# Altium PCB tc_tp6_ej3.PcbDoc
Units mm, origin at the board's own origin, x right, y up, seen from the top; angles counter-clockwise.
Board outline 100 x 100 mm, 2 copper layers (Top Layer, Bottom Layer); 34 components, 26 nets, 92 pads, 0 vias.
Unrouted connection lines stored in the file: 2.
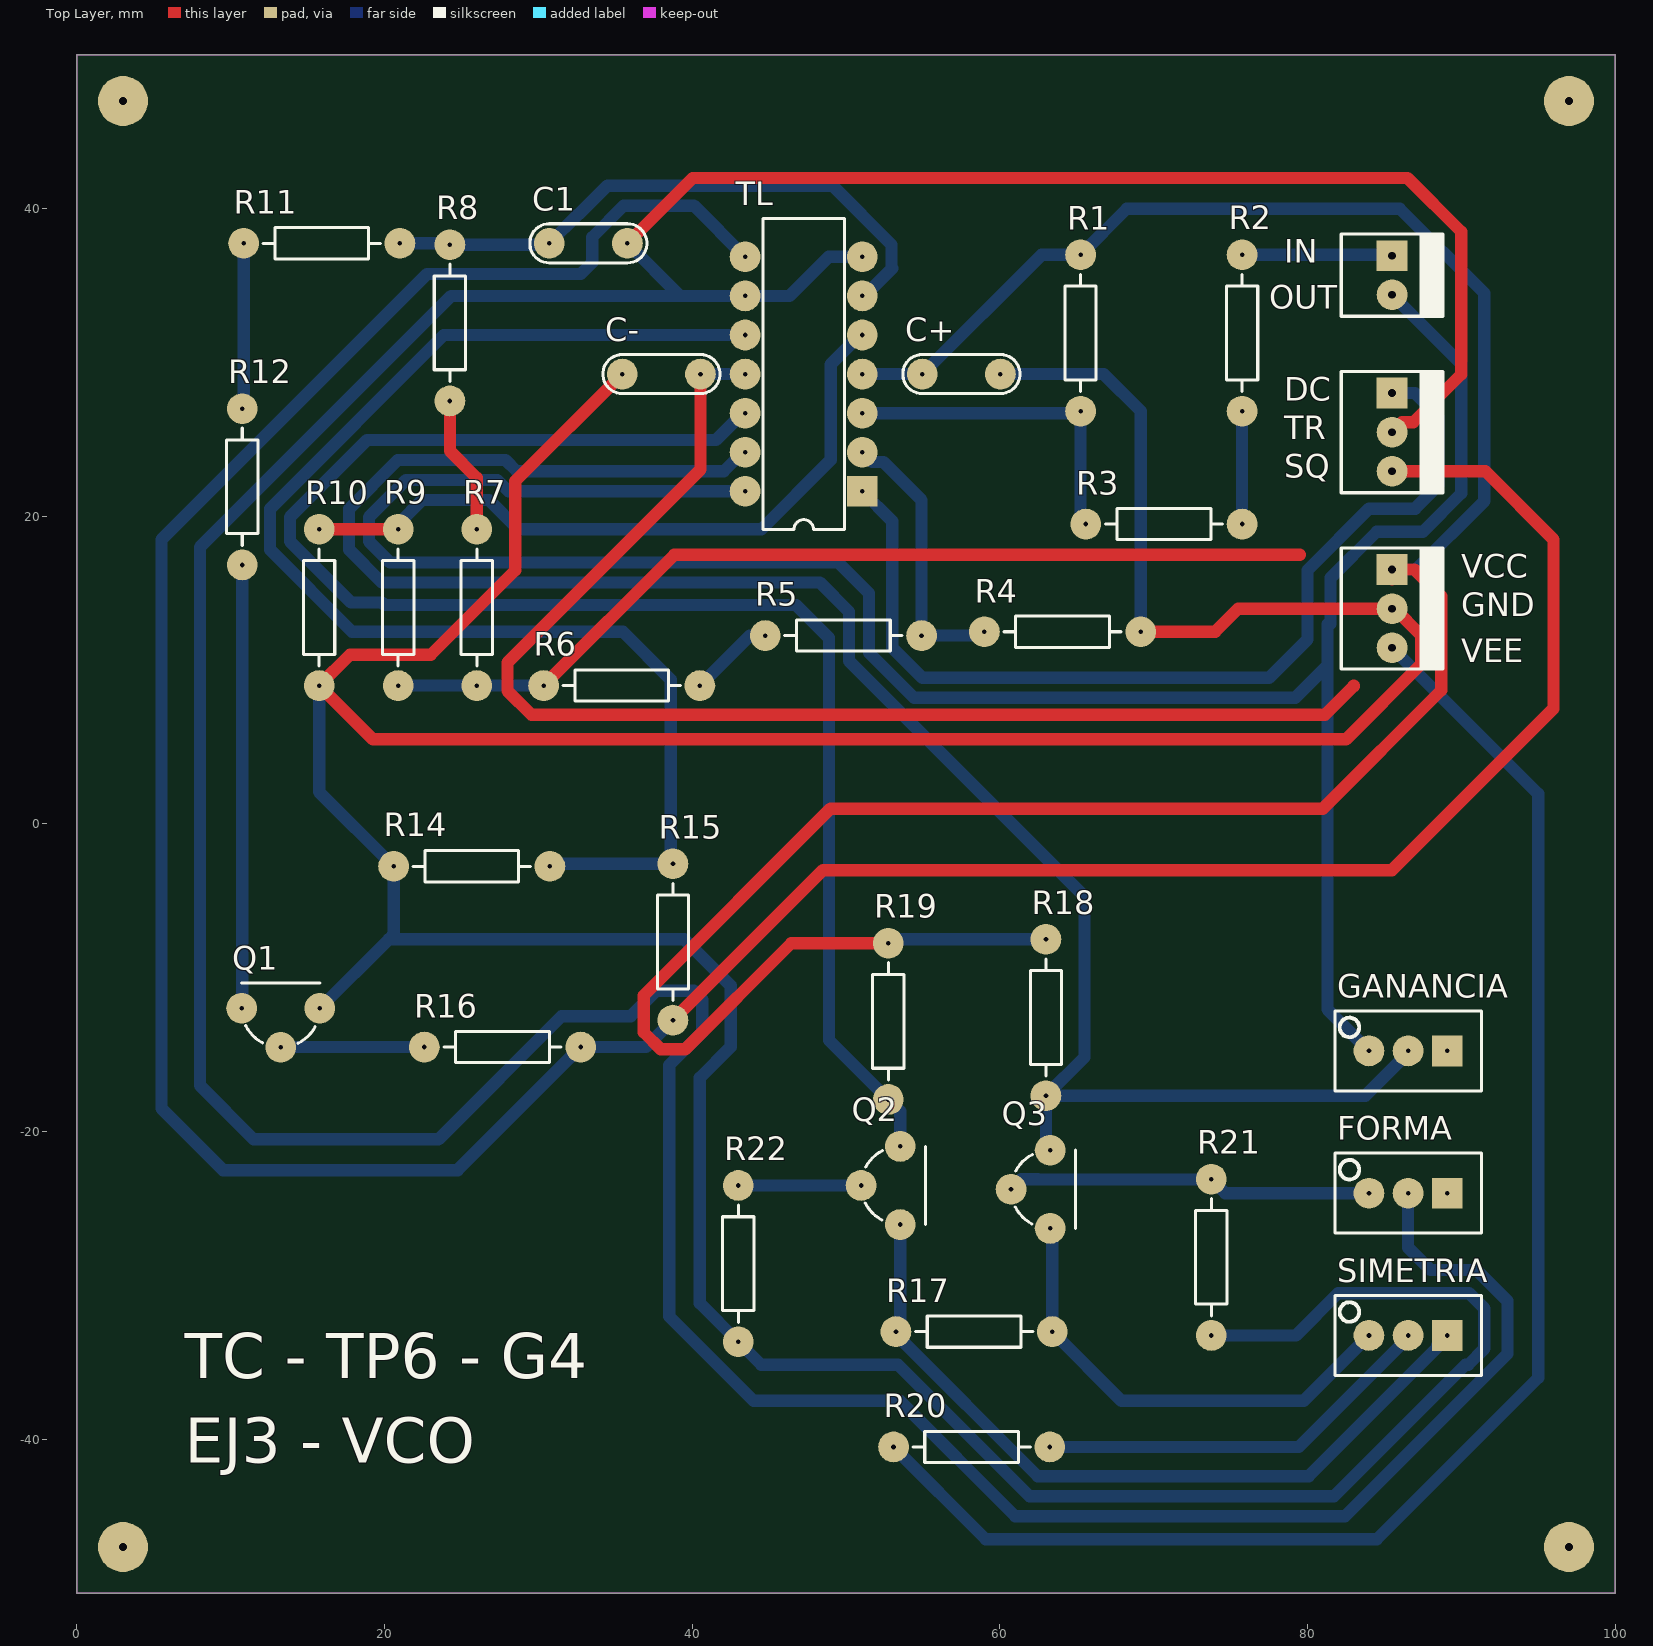
[diagram p0: Top Layer view]
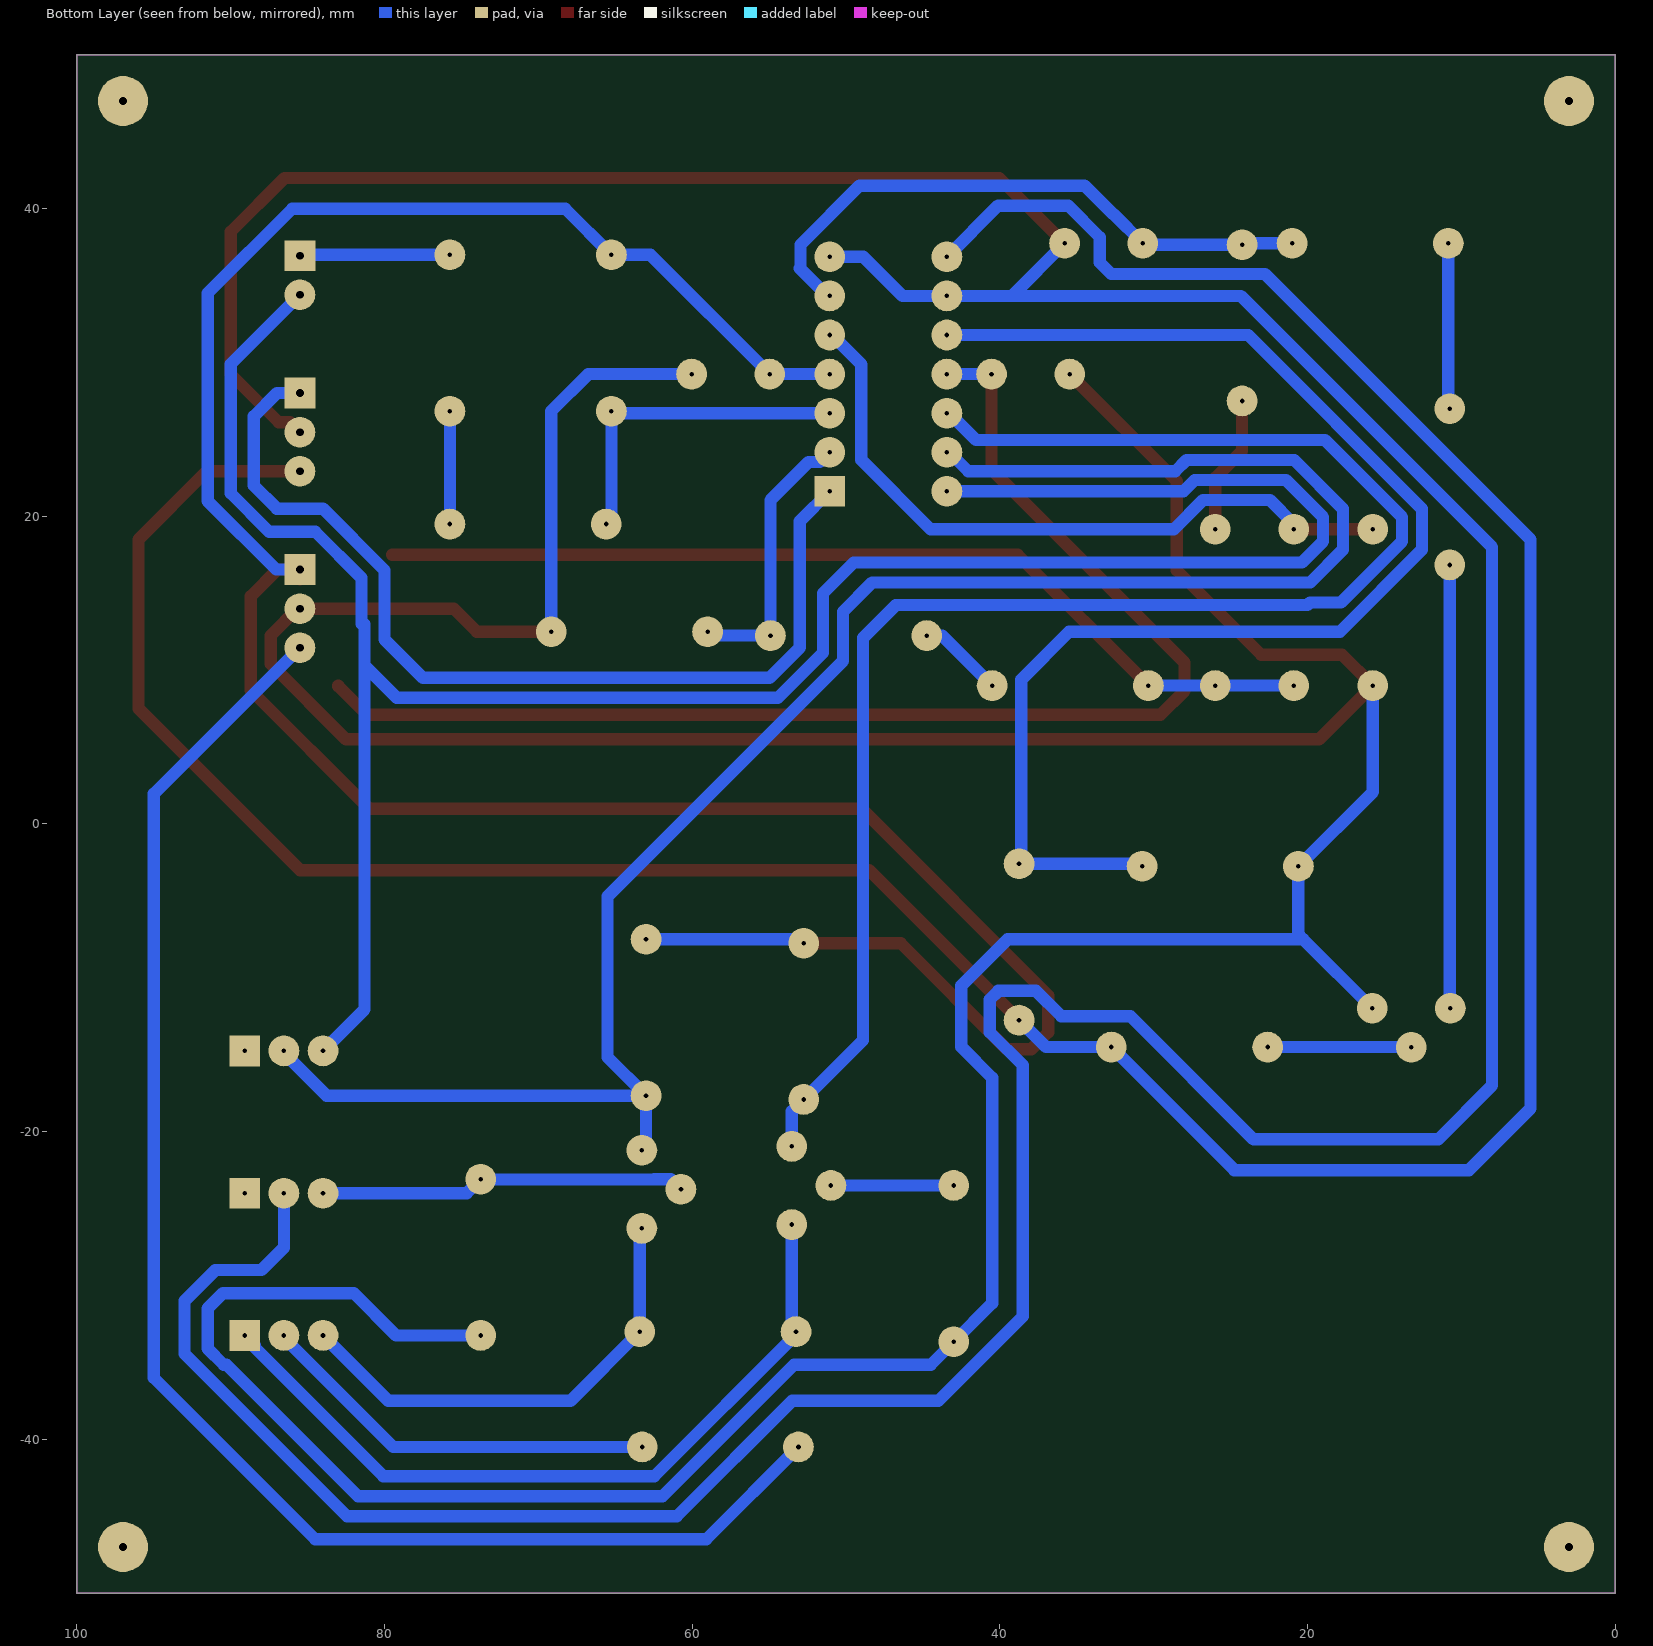
[diagram p1: Bottom Layer view, seen from below]
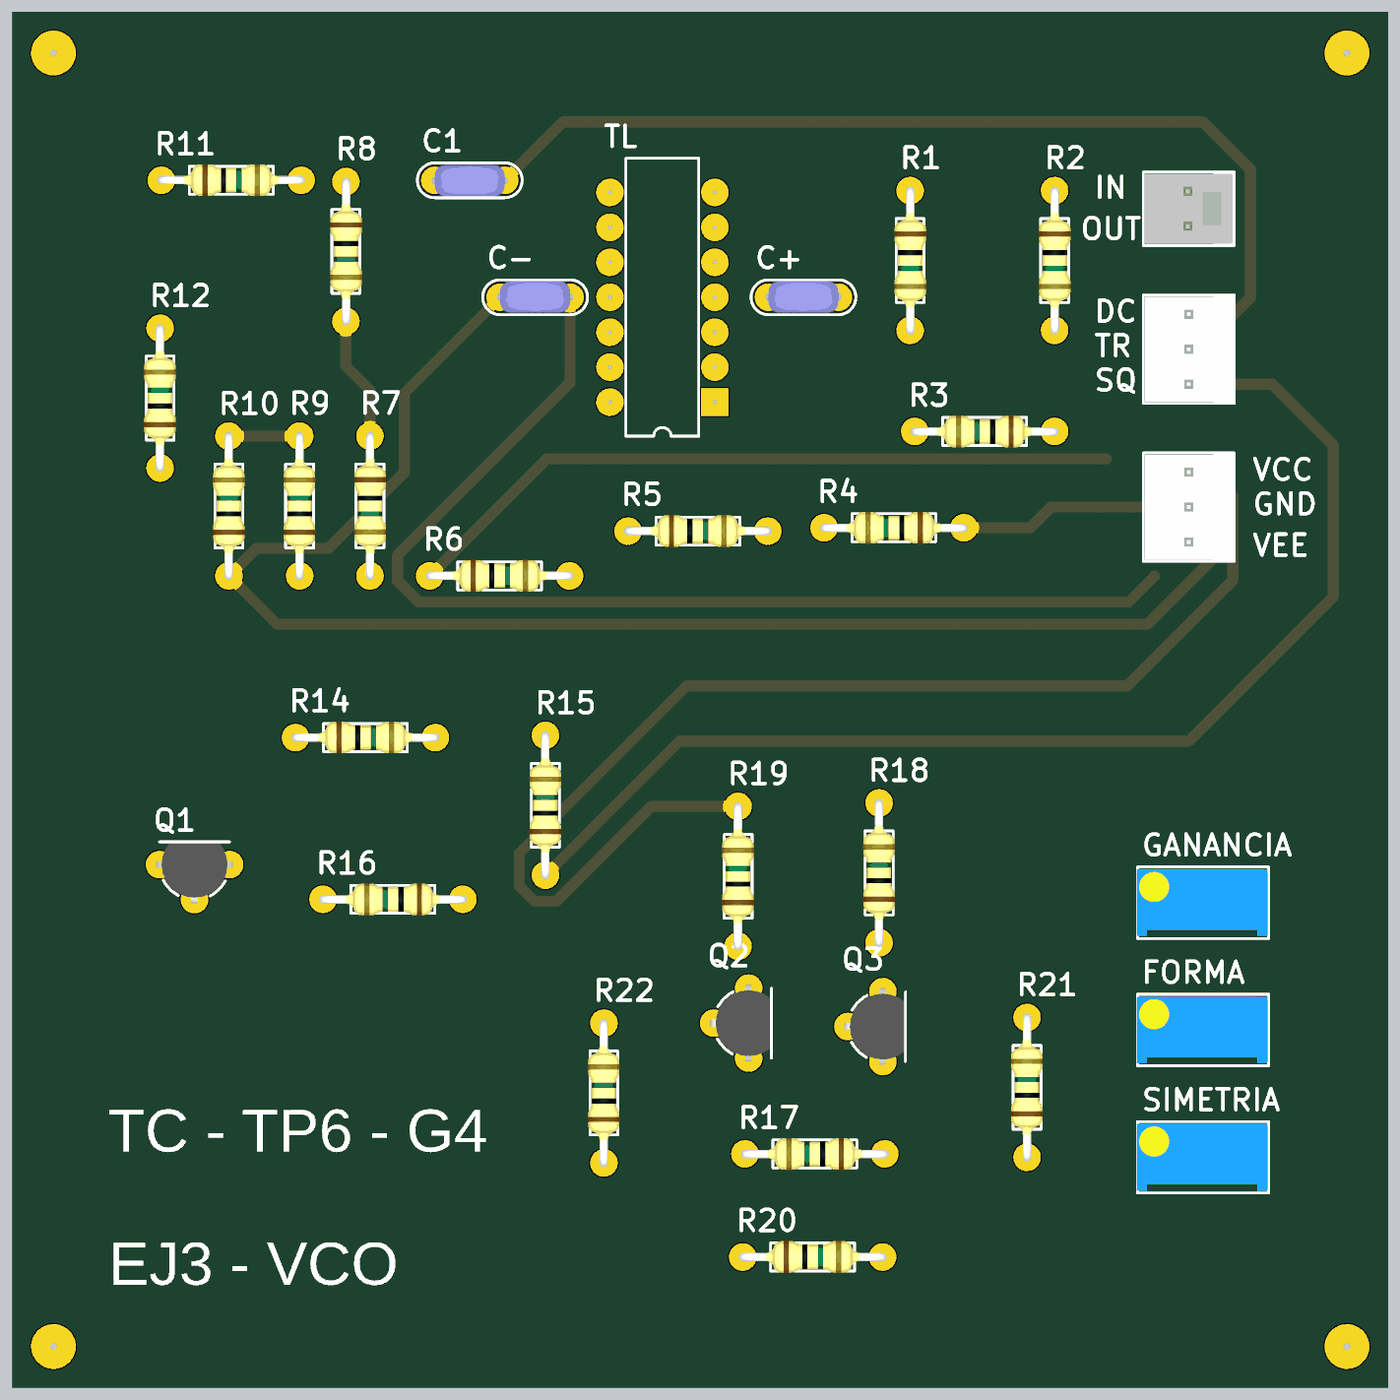
[diagram p2: 3D render of the assembled board from above, using the file's embedded part models]

## Layer stack, top to bottom
Top Solder: solder mask 0.0102, Solder Resist, Dk 3.5
Top Layer: signal copper 0.0356
Dielectric 1: dielectric 0.32, FR-4, Dk 4.8
Bottom Layer: signal copper 0.0356
Bottom Solder: solder mask 0.0102, Solder Resist, Dk 3.5

## Board outline
0,50 100,50 100,-50 0,-50

## Design rules (kind name [scope] priority, off if disabled: settings)
Clearance [All] p1: gap=0.5 ignorepadtopadclearanceinfootprint=FALSE
PolygonConnect [All] p1: connectstyle=Relief reliefconductorwidth=0.254 reliefentries=4 polygonreliefangle="90 Angle" airgapwidth=0.254
RoutingVias [All] p1: holewidth=0.3 width=2 viastyle="Through Hole" minholewidth=0.3 minwidth=2 maxholewidth=0.3 maxwidth=2
SolderMaskExpansion [All] p1: expansion=0.102
Width [All] p1: maxlimit=0.8 minlimit=0.8 preferedwidth=0.8
30 further rules are at their usual default settings.

## Components (designator, comment, footprint, x,y, rotation, side; value= is the part's Value field where it differs from the comment)
C1 "10n" CAP200 33.25,37.75 r0 top
C+ "100n" CAP200 57.5,29.25 r180 top
C- "100n" CAP200 38,29.25 r180 top
DC "MOLEX3" MOLEX3 85.5,28.014 r270 top (schematic designator ETAPAS)
FORMA "PRESET" "PRESET V" 86.54,-24 r180 top (schematic designator PRE1)
GANANCIA "PRESET" "PRESET V" 86.54,-14.75 r180 top (schematic designator PRE3)
IN "MOLEX2" MOLEX2 85.5,36.947 r270 top (schematic designator INOUT)
Q1 "2N2222" TO92 13.25,-13.25 r0 top
Q2 "2N2222" TO92 52.25,-23.5 r270 top
Q3 "2N2222" TO92 62,-23.75 r270 top
R1 "33k" RES400 65.25,37 r270 top
R2 "22R" RES400 75.75,37 r270 top
R3 "1k2" RES400 75.75,19.5 r180 top
R4 "15k" RES400 69.16,12.5 r180 top
R5 "12k" RES400 44.75,12.25 r0 top
R6 "1k" RES400 30.34,9 r0 top
R7 "1k" RES400 26,19.16 r270 top
R8 "1k5" RES400 24.25,37.66 r270 top
R9 "10k" RES400 20.888,9 r90 top
R10 "10k" RES400 15.75,9 r90 top
R11 "1k2" RES400 10.84,37.75 r0 top
R12 "47R" RES400 10.75,16.84 r90 top
R14 "1k" RES400 20.59,-2.75 r0 top
R15 "2k2" RES400 38.75,-12.75 r90 top
R16 "1k" RES400 32.75,-14.5 r180 top
R17 "390R" RES400 63.41,-33 r180 top
R18 "10k" RES400 63,-17.66 r90 top
R19 "10k" RES400 52.75,-17.91 r90 top
R20 "18k" RES400 53.09,-40.5 r0 top
R21 "2k2" RES400 73.75,-33.25 r90 top
R22 "2k2" RES400 43,-33.66 r90 top
SIMETRIA "PRESET" "PRESET V" 86.54,-33.25 r180 top (schematic designator PRE2)
TL "TL074CN" DIP14 47.25,29.25 r90 top
VCC "MOLEX3" MOLEX3 85.5,16.54 r270 top (schematic designator ALIMENTACION)

## Footprints (in the part's own frame and the unit in brackets; to place one, negate y for a bottom-side part, rotate by r counter-clockwise, add the part's x,y. Pads: shape width x height; smd on the part's side, far side on the other; paste and mask are expansions set on the pad)
CAP200 [mm]
  round 2 hole 0.3: 1(-2.54,0) 2(2.54,0)
  silkscreen extent -3.81,-1.27 3.81,1.27, body extent -2.79,-1.17 2.79,1.12, height 6.24
DIP14 [mm] "DIP; 14 Leads; Row Spacing 7.62 mm; Pitch 2.54 mm"
  rect 2x2 hole 0.3: 1(-7.62,-3.81)
  round 2 hole 0.3: 2(-5.08,-3.81) 3(-2.54,-3.81) 4(0,-3.81) 5(2.54,-3.81) 6(5.08,-3.81) 7(7.62,-3.81) 8(7.62,3.81) 9(5.08,3.81) 10(2.54,3.81) 11(0,3.81) 12(-2.54,3.81) 13(-5.08,3.81) 14(-7.62,3.81)
  silkscreen extent -10.1,-2.65 10.1,2.65
MOLEX2 [mm]
  rect 2x2 hole 0.5: 1(0,0)
  round 2 hole 0.5: 2(2.54,0)
  silkscreen extent -1.4,-3.3 3.94,3.3, body extent -1.27,-3.18 3.81,3.18, height 10.74
MOLEX3 [mm]
  rect 2x2 hole 0.5: 1(0,0)
  round 2 hole 0.5: 2(2.54,0) 3(5.08,0)
  silkscreen extent -1.4,-3.3 6.48,3.3, body extent -1.27,-3.18 6.35,3.18, height 10.74
"PRESET V" [mm]
  rect 2x2 hole 0.3: 1(-2.54,0)
  round 2 hole 0.3: 2(0,0) 3(2.54,0)
  silkscreen extent -4.76,-2.6 4.76,2.6, body extent -4.7,-2.42 4.83,2.42, height 11.55
RES400 [mm]
  round 2 hole 0.3: 1(0,0) 2(10.16,0)
  silkscreen extent 1.27,-1.02 8.89,1.02, body extent -0.3,-1.14 10.46,1.17, height 2.43
TO92 [mm]
  round 2 hole 0.3: 1(0,-1.27) 2(2.54,1.27) 3(-2.54,1.27)
  silkscreen extent -2.54,-1 2.54,2.92, body extent -2.79,-1.55 2.79,2.79, height 8

## Part data
C1 C+ C-: library part CAP
R1 R2 R3 R4 R5 R6 R7 R8 R9 R10 R11 R12 R14 R15 R16 R17 R18 R19 R20 R21 R22: library part RES
TL: "Low-Noise J-FET Quad Operational Amplifier", ComponentLink1Description="Manufacturer Link", ComponentLink1URL=http://www.st.com/, ComponentLink2Description=Datasheet, ComponentLink2URL=http://www.st.com/stonline/products/literature/ds/2297/tl074.pdf, DatasheetVersion=Dec-1998, LatestRevisionDate=06-Jun-2005, LatestRevisionNote="Stylized 3D Model Added.", PackageDescription="DIP; 14 Leads; Row Spacing 7.62 mm; Pitch 2.54 mm", PackageReference=DIP14, PackageVersion=Jan-1997, Published=24-Aug-2001, Publisher="Altium Limited"

## Free pads (board coordinates)
  round 3.25 hole 0.5: 1(3,-47) 1(3,47) 1(97,-47) 1(97,47)

## Nets (pads, with @x,y where several pads share a name; then routed paths per layer and width w, separated by ;. In a path a pad name is that pad's centre, name@x,y a point inside that pad or via, vN(x,y) a via of type N, cw(c..) or ccw(c..) an arc to the next point about the centre after c; other vN are vias at no path point)
DC: DC.1 R6.1 R7.2 R9.1 TL.1 | length 125.8
  Top Layer w0.8: R6.1 38.84,17.5 79.5,17.5 ; DC.1@85.014,28.014 DC.1
  Bottom Layer w0.8: R9.1 R7.2 R6.1 ; TL.1 53,19.69 53,11.473 54.973,9.5 77.5,9.5 80,12 80,16.5 84,20.5 87,20.5 88.5,22 88.5,26.5 86.986,28.014 DC.1
GND: C+.1 C-.2 Q1.2 R4.1 R10.1 R14.1 R21.1 R22.1 VCC.2 | length 304.5
  Top Layer w0.8: C-.2 28.5,22.29 28.5,16.5 23,11 17.75,11 R10.1 19.25,5.5 82.5,5.5 87.4,10.4 87.4,12.247 85.647,14 VCC.2 75.5,14 74,12.5 R4.1
  Bottom Layer w0.8: R10.1 15.75,2.09 R14.1 20.59,-7.18 20.27,-7.5 ; Q1.2 20.27,-7.5 ; C+.1 66.75,29.25 69.16,26.84 R4.1 ; R21.1 79.25,-33.25 82,-30.5 90.5,-30.5 91.5,-31.5 91.5,-34.103 90.453,-35.15 90.278,-35.15 81.728,-43.7 61.925,-43.7 53.375,-35.15 44.49,-35.15 R22.1 40.5,-31.16 40.5,-16.5 42.5,-14.5 42.5,-10.5 39.5,-7.5 20.27,-7.5
IN: IN.1 R2.1 | length 9.8
  Bottom Layer w0.8: R2.1 85.447,37 IN.1
NetC1_1: C1.1 R8.1 R11.2 TL.6 | length 39.6
  Bottom Layer w0.8: R11.2 24.16,37.75 R8.1 30.62,37.66 C1.1 32.61,39.65 32.65,39.65 34.5,41.5 49.117,41.5 52.96,37.657 52.96,36.163 53,36.123 51.207,34.33 TL.6 TL.6@50.913,34.33
NetPRE1_3: FORMA.3 Q3.1 R21.2 | length 23.9
  Bottom Layer w0.8: Q3.1 61.39,-23.09 62.463,-23.09 62.483,-23.11 73.75,-23.11 R21.2 74.66,-24 FORMA.3
NetPRE2_1: Q2.2 R17.2 SIMETRIA.1 | length 51.7
  Bottom Layer w0.8: Q2.2 53.52,-32.73 R17.2 53.25,-33.187 62.463,-42.4 80.077,-42.4 89.08,-33.397 SIMETRIA.1 SIMETRIA.1@88.44,-33.89
NetPRE2_2: R20.2 SIMETRIA.2 | length 26.4
  Bottom Layer w0.8: R20.2 79.437,-40.5 86.54,-33.397 SIMETRIA.2
NetPRE2_3: Q3.2 R17.1 SIMETRIA.3 | length 31
  Bottom Layer w0.8: Q3.2 63.41,-26.43 R17.1 67.91,-37.5 79.75,-37.5 SIMETRIA.3
NetQ1_1: Q1.1 R16.2 | length 9.3
  Bottom Layer w0.8: Q1.1 13.27,-14.5 R16.2
NetQ1_3: Q1.3 R12.1 | length 28.8
  Bottom Layer w0.8: Q1.3 10.75,-11.94 R12.1
NetQ2_1: Q2.1 R22.2 | length 8
  Bottom Layer w0.8: R22.2 Q2.1
NetR1_2: R1.2 R3.2 TL.3 | length 21.7
  Bottom Layer w0.8: TL.3 65.12,26.71 R1.2 65.25,19.84 R3.2
NetR2_2: R2.2 R3.1 | length 7.3
  Bottom Layer w0.8: R3.1 R2.2
NetR4_2: R4.2 R5.2 TL.2 | length 18.1
  Bottom Layer w0.8: TL.2 51.7,23.53 52.433,23.53 54.91,21.053 R5.2 58.75,12.25 R4.2
NetR5_1: R5.1 R6.2 | length 5.6
  Bottom Layer w0.8: R6.2 43.75,12.25 R5.1
NetR7_1: R7.1 R8.2 | length 9.1
  Top Layer w0.8: R8.2 24.25,24.25 26,22.5 R7.1
NetR9_2: R9.2 R10.2 TL.5 | length 46
  Top Layer w0.8: R10.2 R9.2
  Bottom Layer w0.8: R9.2 20.888,19.508 22.44,21.06 26.787,21.06 28.684,19.163 44.5,19.163 49,23.663 49,29.877 50.913,31.79 TL.5
NetR11_1: R11.1 R12.2 | length 10.8
  Bottom Layer w0.8: R12.2 10.84,27.09 R11.1
NetR14_2: R14.2 R15.2 TL.10 | length 87.8
  Bottom Layer w0.8: R14.2 30.91,-2.59 R15.2@38.6,-2.59 ; R15.2 R15.2@38.6,-2.59 ; TL.10 23.855,31.79 12.55,20.485 12.55,17.835 17.885,12.5 35.5,12.5 38.6,9.4 R15.2@38.6,-2.59
OUT: GANANCIA.3 IN.2 TL.14 | length 154.4
  Bottom Layer w0.8: TL.14 28.055,21.63 27.325,22.36 21.401,22.36 18.988,19.947 18.988,18.373 20.361,17 49.5,17 51.5,15 51.5,11.135 54.435,8.2 79.2,8.2 81.3,10.3 ; 81.3,13 81.3,10.3 ; 81.5,13 81.5,16 84.5,19 87.5,19 90,21.5 90,29.907 IN.2 ; GANANCIA.3 81.3,-12.05 81.3,10.3
S1: GANANCIA.2 Q3.3 R18.1 TL.13 | length 132
  Bottom Layer w0.8: TL.13 43.293,24.17 42.053,22.93 28.594,22.93 27.864,23.66 20.862,23.66 17.688,20.485 17.688,17.835 19.822,15.7 48.3,15.7 50.2,13.8 50.2,10.596 65.5,-4.704 65.5,-15.16 R18.1 ; Q3.3 63,-20.94 R18.1 ; GANANCIA.2 86.54,-14.897 83.777,-17.66 R18.1
S2: Q2.3 R19.1 TL.12 | length 106.6
  Bottom Layer w0.8: TL.12 43.293,26.71 41.543,24.96 18.863,24.96 13.85,19.947 13.85,18.373 17.823,14.4 19.84,14.4 20,14.24 46.76,14.24 48.9,12.1 48.9,-14.06 R19.1 53.52,-18.68 Q2.3
SQ: DC.3 R15.1 R16.1 TL.8 | length 214.2
  Top Layer w0.8: R15.1 48.5,-3 85.5,-3 96,7.5 96,18.5 91.566,22.934 DC.3
  Bottom Layer w0.8: R15.1 37,-14.5 R16.1 24.75,-22.5 9.5,-22.5 5.5,-18.5 5.5,18.5 22.76,35.76 32.76,35.76 33.5,36.5 33.5,38.147 35.553,40.2 40.11,40.2 TL.8
TR: C1.2 DC.2 FORMA.2 TL.7 TL.9 | length 302.5
  Top Layer w0.8: C1.2 40.04,42 86.5,42 90,38.5 90,29.241 86.873,26.114 86.14,26.114 DC.2
  Bottom Layer w0.8: C1.2 39.21,34.33 ; TL.7@51.207,36.87 TL.7 48.87,36.87 46.33,34.33 TL.9 39.21,34.33 ; FORMA.2 86.54,-27.54 88,-29 91,-29 93,-31 93,-34.441 82.441,-45 61,-45 53.5,-37.5 44,-37.5 38.5,-32 38.5,-15.687 40.65,-13.537 40.65,-11.406 40.094,-10.85 37.65,-10.85 36,-12.5 31.5,-12.5 23.5,-20.5 11.5,-20.5 8,-17 8,18 24.33,34.33 39.21,34.33
VCC: C+.2 R1.1 R18.2 R19.2 TL.4 VCC.1 | length 171.6
  Top Layer w0.8: R19.2 46.437,-7.75 39.537,-14.65 37.963,-14.65 36.85,-13.537 36.85,-11.15 49,1 81,1 88.7,8.7 88.7,14.8 86.96,16.54 VCC.1 VCC.1@85.5,15.9 ; R18.2@62.75,-7.75 R18.2
  Bottom Layer w0.8: TL.4 C+.2 62.71,37 R1.1 68.25,40 86,40 91.5,34.5 91.5,21 87.04,16.54 VCC.1 ; R19.2 53,-7.5 R18.2
VEE: C-.1 R20.1 TL.11 VCC.3 | length 185.3
  Top Layer w0.8: C-.1 40.54,23.04 28,10.5 28,8.653 29.553,7.1 81.14,7.1 83,8.96 83,9
  Bottom Layer w0.8: C-.1 TL.11 ; R20.1 59.09,-46.5 84.5,-46.5 95,-36 95,1.96 VCC.3
pads on no net: FORMA.1 GANANCIA.1

## Keep-outs
Keep-Out Layer:
  the board outline again, w0.1

## Silkscreen, mask and mechanical layers (free items; w line width, h text height)
Top Overlay:
  text "OUT" at 77.5,33.5 h1.52
  text "TR" at 78.5,25 h1.52
  text "SQ" at 78.5,22.5 h1.52
  text "GND" at 90,13.5 h1.52
  text "VEE" at 90,10.5 h1.52
  text "TC - TP6 - G4" at 7,-37 h5
  text "EJ3 - VCO" at 7,-42.5 h5